# Altium PCB MPU6050单模块.PcbDoc
Units mil, origin at the board's own origin, x right, y up, seen from the top; angles counter-clockwise.
Board outline 477.64 x 374.02 mil, 2 copper layers (Top Layer, Bottom Layer); 15 components, 10 nets, 58 pads, 10 vias.
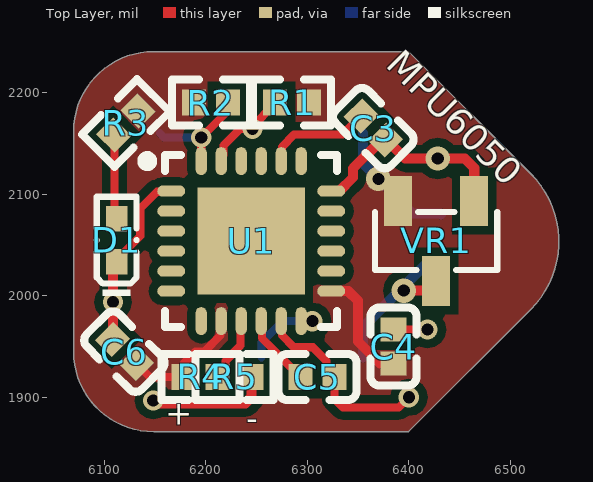
[diagram p0: Top Layer view]
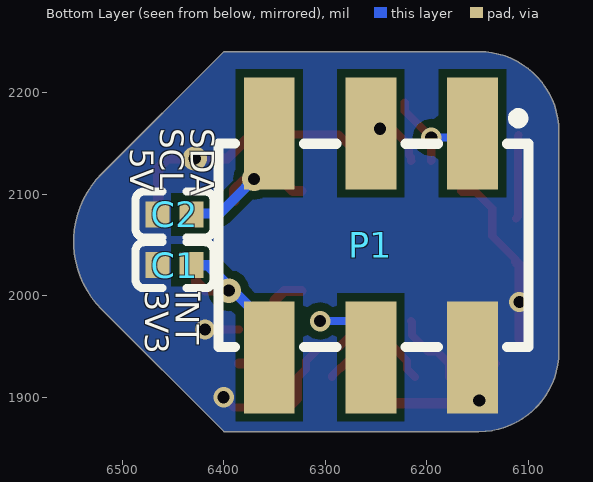
[diagram p1: Bottom Layer view, seen from below]
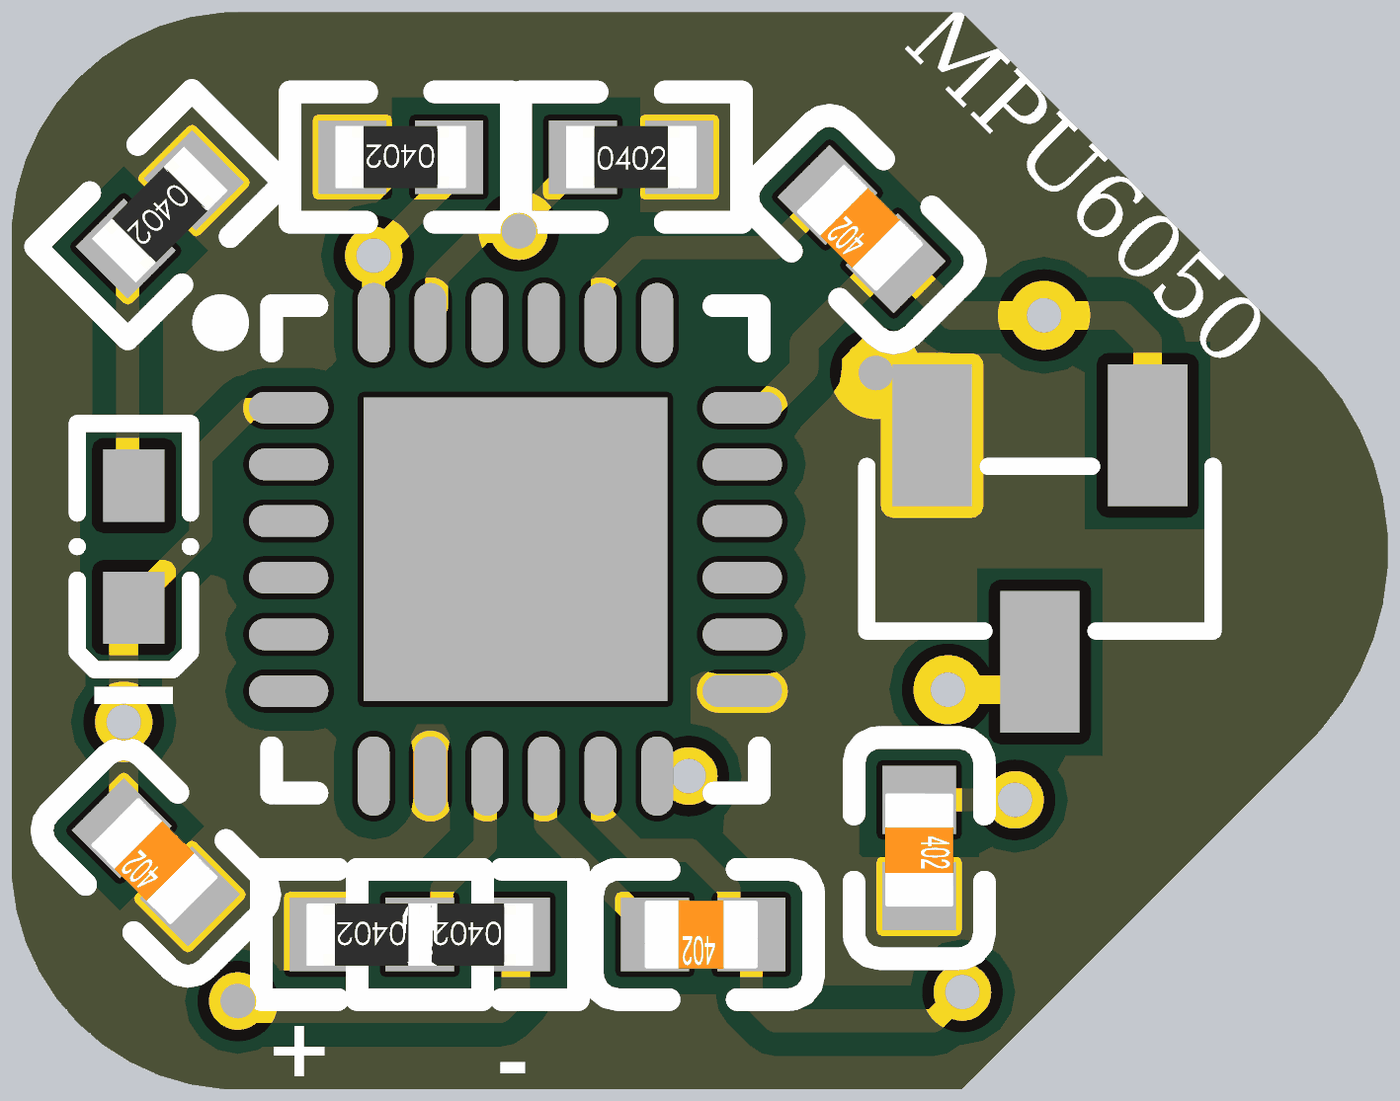
[diagram p2: 3D render of the assembled board from above, using the file's embedded part models]

## Layer stack, top to bottom
Top Solder: solder mask 0.4, Solder Resist, Dk 3.5
Top Layer: signal copper 1.4
Dielectric 1: dielectric 12.6, FR-4, Dk 4.8
Bottom Layer: signal copper 1.4
Bottom Solder: solder mask 0.4, Solder Resist, Dk 3.5

## Board outline
6070,1945 ccw(c6148.74,1945) 6148.74,1866.26 6399.72,1866.26 6520,1986.54 ccw(c6453.27,2053.27) 6520,2120 6399.72,2240.28 6148.74,2240.28 ccw(c6148.74,2161.54) 6070,2161.54

## Design rules (kind name [scope] priority, off if disabled: settings)
Clearance [All] p1: gap=8 ignorepadtopadclearanceinfootprint=TRUE
ComponentClearance [All] p1: gap=0 collisioncheckmode=3 verticalgap=10 showdistances=FALSE
PolygonConnect [All] p1: connectstyle=Direct reliefconductorwidth=10 reliefentries=4 polygonreliefangle="90 Angle" airgapwidth=10
RoutingVias [All] p1: holewidth=12 width=20 viastyle="Through Hole" minholewidth=12 minwidth=20 maxholewidth=28 maxwidth=50
SolderMaskExpansion [All] p1: expansion=4
Width [All] p1: maxlimit=20 minlimit=6 preferedwidth=10
29 further rules are at their usual default settings.

## Components (designator, comment, footprint, x,y, rotation, side; value= is the part's Value field where it differs from the comment)
C1 "1uF" 0402_C 6448.27,2030 r180 bottom
C2 "1uF" 0402_C 6448.27,2080 r180 bottom
C3 "220pF" 0402_C 6365,2165 r135 top
C4 "0.1uF" 0402_C 6385,1950 r270 top
C5 "0.1uF" 0402_C 6310,1920 r180 top
C6 "0.01uF" 0402_C 6120,1945 r135 top
D1 "翠绿 0402" "0402 LED" 6115,2055 r90 top
P1 "Header 3X2" 贴片排针2X3P 6255,2055 r0 bottom
R1 "4K7" 0402_R 6285,2190 r0 top
R2 "4K7" 0402_R 6205,2190 r180 top
R3 "1K" 0402_R 6121.41,2170 r225 top
R4 "0Ω" 0402_R 6195,1920 r180 top
R5 "4K7" 0402_R 6228.27,1920 r180 top
U1 "MPU-6050" QFN-24_4x4x05P 6244.84,2053.74 r270 top
VR1 "ME6216A33M3G" ME6216A33M3G 6430,2065 r90 top

## Footprints (in the part's own frame and the unit in brackets; to place one, negate y for a bottom-side part, rotate by r counter-clockwise, add the part's x,y. Pads: shape width x height; smd on the part's side, far side on the other; paste and mask are expansions set on the pad)
"0402 LED" [mm]
  rect 0.636x0.54 smd: A(0.531,0.067) K(-0.545,0.067)
  silkscreen extent -1.4,-0.47 1.08,0.6
0402_C [mm]
  rect 0.6x0.65 smd mask+0.051: 1(-0.425,0) 2(0.425,0)
  silkscreen extent -0.97,-0.58 0.98,0.58, body extent -0.48,-0.3 0.52,0.3, height 0.2
0402_R [mm]
  rect 0.6x0.65 smd mask+0.051: 1(-0.425,0) 2(0.425,0)
  silkscreen extent -0.97,-0.58 0.97,0.58, body extent -0.57,-0.27 0.58,0.28, height 0.41
ME6216A33M3G [mm] "SOT-23"
  rect 1.25x0.7 smd: 1(0.72,-0.872) 2(0.72,1.028) 3(-1.28,0.078)
  silkscreen extent -1.01,-1.45 0.45,1.6
QFN-24_4x4x05P [mm]
  rect 2.68x2.68 smd mask+0.051: 0(0,0)
  oval 0.28x0.7 smd mask+0.051: 1(-1.25,-2) 2(-0.75,-2) 3(-0.25,-2) 4(0.25,-2) 5(0.75,-2) 6(1.25,-2) 13(1.25,2) 14(0.75,2) 15(0.25,2) 16(-0.25,2) 17(-0.75,2) 18(-1.25,2)
  oval 0.7x0.28 smd mask+0.051: 7(2,-1.25) 8(2,-0.75) 9(2,-0.25) 10(2,0.25) 11(2,0.75) 12(2,1.25) 19(-2,1.25) 20(-2,0.75) 21(-2,0.25) 22(-2,-0.25) 23(-2,-0.75) 24(-2,-1.25)
  silkscreen extent -2.15,-2.72 2.15,2.15
贴片排针2X3P [mm]
  rect 1.27x2.8 smd: 1(-2.54,-2.664) 2(-2.54,2.936) 3(0,-2.664) 4(0,2.936) 5(2.54,-2.664) 6(2.54,2.936)
  silkscreen extent -3.94,-3.17 3.81,2.68

## Part data
C1 C2 C3 C4 C5 C6: library part Cap_0402, "0402贴片电容", Package=0402, 常见贴片电容尺寸图=https://wenku.baidu.com/view/21d5206100f69e3143323968011ca300a6c3f
D1: library part "0603 白灯", "发光二极管", Package=0603, SuppliersPartNumber=C2290, ComponentLink1Description=供应商, ComponentLink1URL=http://www.szlcsc.com/product/details_2663.html, Supplier=LC
P1: "Header, 3-Pin, Dual row"
R1 R2 R3 R4 R5: library part Res_0402, "贴片电阻", Package=0402, SuppliersPartNumber=C17168, ComponentLink1Description=供应商, ComponentLink1URL=http://www.szlcsc.com/product/details_17853.html, Supplier=LC
U1: "传感器", Package=QFN-24_4x4x05P, SuppliersPartNumber=C24112, ComponentLink1Description=供应商, ComponentLink1URL=http://www.szlcsc.com/product/details_24852.html, Supplier=LC
VR1: library part "XC6206P332MR  SOT-23", "低压差线性稳压(LDO)", Package=SOT-23, SuppliersPartNumber=C5446, ComponentLink1Description=供应商, ComponentLink1URL=http://www.szlcsc.com/product/details_5896.html, Supplier=LC

## Via types
v1: diameter 20, hole 12, Top Layer to Bottom Layer, 7 vias
v2: diameter 24, hole 12, Top Layer to Bottom Layer, 3 vias

## Nets (pads, with @x,y where several pads share a name; then routed paths per layer and width w, separated by ;. In a path a pad name is that pad's centre, name@x,y a point inside that pad or via, vN(x,y) a via of type N, cw(c..) or ccw(c..) an arc to the next point about the centre after c; other vN are vias at no path point)
3V3: C2.2 C4.2 C6.1 P1.5 R1.2 R2.2 R3.1 R4.2 U1.8 U1.13 VR1.2 | length 404.3
  Top Layer w8: C6.1 6145,1920 R4.2 6178.27,1933.27 6190,1945 6198.66,1945 6214.74,1961.07 6214.74,1974.42 U1.8
  Top Layer w10: U1.13 6340.47,2004.53 6350,1995 6350,1955 6371.73,1933.27 C4.2 ; v2(6370,2115) 6372.05,2112.95 6380.73,2112.95 6389.51,2104.17 VR1.2
  Bottom Layer w10: P1.5 6355,2129.76 6403.78,2080.98 6431.54,2080.98 C2.2
AD0: R4.1 R5.2 U1.9 | length 64.7
  Top Layer w8: R5.2 6219.35,1927.81 6219.35,1935.92 6234.42,1951 6234.42,1974.42 U1.9
GND: C1.1 C2.1 C3.1 C4.1 C5.1 C6.2 D1.K P1.2 R5.1 U1.1 U1.11 U1.18 VR1.1 | length 732.6
  Top Layer w8: D1.K 6112.37,2035.43 6135.59,2058.65 6135.59,2085.79 6152.18,2102.37 6165.52,2102.37 U1.1 ; U1.11 6274.95,1974.42 6274.95,1961.07 6286.8,1949.22 6305.62,1949.22 6318.92,1935.92 6318.92,1927.81 C5.1 6326.73,1898.27 6335,1890 6390,1890 v1(6400,1900) ; C4.1 v1(6418.27,1966.73)
  Top Layer w10: C6.2 6108.86,1957.53 v1(6108.86,1993.78) 6108.86,2030.02 D1.K ; v1(6148.46,1896.87) 6151.12,1894.2 6239.2,1894.2 6245,1900 R5.1 ; U1.18 6331.57,2102.95 6345,2116.38 6345,2125.36 6372.81,2153.17 C3.1 6377.53,2153.86 6396.37,2135.03 v2(6428.33,2135.03) 6454.98,2135.03 6464.31,2125.68 VR1.1
INT: P1.4 U1.12 | length 84.2
  Top Layer w8: U1.12 v1(6305,1975)
  Bottom Layer w8: P1.4 6255,1954 6276,1975 v1(6305,1975)
NetC3_2: C3.2 U1.20 | length 105
  Top Layer w8: U1.20 6274.95,2133.06 6274.95,2146.41 6287.05,2158.51 6334.85,2158.51 C3.2
NetC5_2: C5.2 U1.10 | length 71.5
  Top Layer w8: U1.10 6255.26,1974.42 6255.26,1958.13 6284.6,1928.8 6285.46,1928.8 6293.27,1920.98 C5.2
NetD1_A: D1.A R3.2 | length 83.4
  Top Layer w8: R3.2 6110.28,2157.47 6110.28,2078 D1.A
SCL: P1.3 R1.1 U1.23 | length 87.5
  Top Layer w8: U1.23 6215.49,2132.65 6215.49,2136.24 6217.49,2138.24 6217.49,2148 6233.75,2164.26 v1(6246.05,2164.26) 6246.05,2164.69 6245,2165.75 6268.27,2189.02 R1.1
SDA: P1.1 R2.1 U1.24 | length 110.7
  Top Layer w8: U1.24 v1(6195.63,2155.79) 6221.73,2181.89 R2.1
  Bottom Layer w8: P1.1 6159.1,2155.79 v1(6195.63,2155.79)
VCC: C1.2 P1.6 VR1.3 | length 168.1
  Top Layer w10: v2(6395,2005) 6418.13,2005 6426.91,2013.78 VR1.3
  Bottom Layer w10: P1.6 6355,1969.53 6415.47,2030 C1.2
pads on no net: U1.0 U1.2 U1.3 U1.4 U1.5 U1.6 U1.7 U1.14 U1.15 U1.16 U1.17 U1.19 U1.21 U1.22

## Polygon pours and split planes (outlines as drawn)
GND on Bottom Layer "Top Layer-No Net1" (solid, remove dead copper, pour order 4): 6070,1945 ccw(c6148.74,1945) 6148.74,1866.26 6399.72,1866.26 6520,1986.54 ccw(c6453.27,2053.27) 6520,2120 6399.72,2240.28 6148.74,2240.28 ccw(c6148.74,2161.54) 6070,2161.54
3V3 on Top Layer "Top Layer-No Net" (solid, remove dead copper, pour order 3): 6070,1945 ccw(c6148.74,1945) 6148.74,1866.26 6399.72,1866.26 6520,1986.54 ccw(c6453.27,2053.27) 6520,2120 6399.72,2240.28 6148.74,2240.28 ccw(c6148.74,2161.54) 6070,2161.54

## Silkscreen, mask and mechanical layers (free items; w line width, h text height)
Top Overlay:
  text "MPU6050" at 6370,2220 h45 r315
  text "+" at 6160,1865 h40
  text "-" at 6240,1860 h40
Bottom Overlay:
  text "SDA" at 6440,2165 h40 r90
  text "SCL" at 6470,2165 h40 r90
  text "5V" at 6500,2145 h40 r90
  text "-" at 6440,2005 h40 r90
  text "INT" at 6455,2005 h40 r90
  text "3V3" at 6485,2005 h40 r90
Mechanical 1:
  the board outline again, w10